# Altium PCB IPG_Rigid.PcbDoc (part 12 of 13)
Units mm, origin at the board's own origin, x right, y up, seen from the top; angles counter-clockwise.
Board outline 69.6 x 90.73 mm, 10 copper layers (TOP, DHOR, DVERT, GND 1, POWER, GND 2, GND 3, AVERT, AHOR, BOT), stack 1.198 mm thick; 745 components, 398 nets, 1997 pads, 2678 vias.
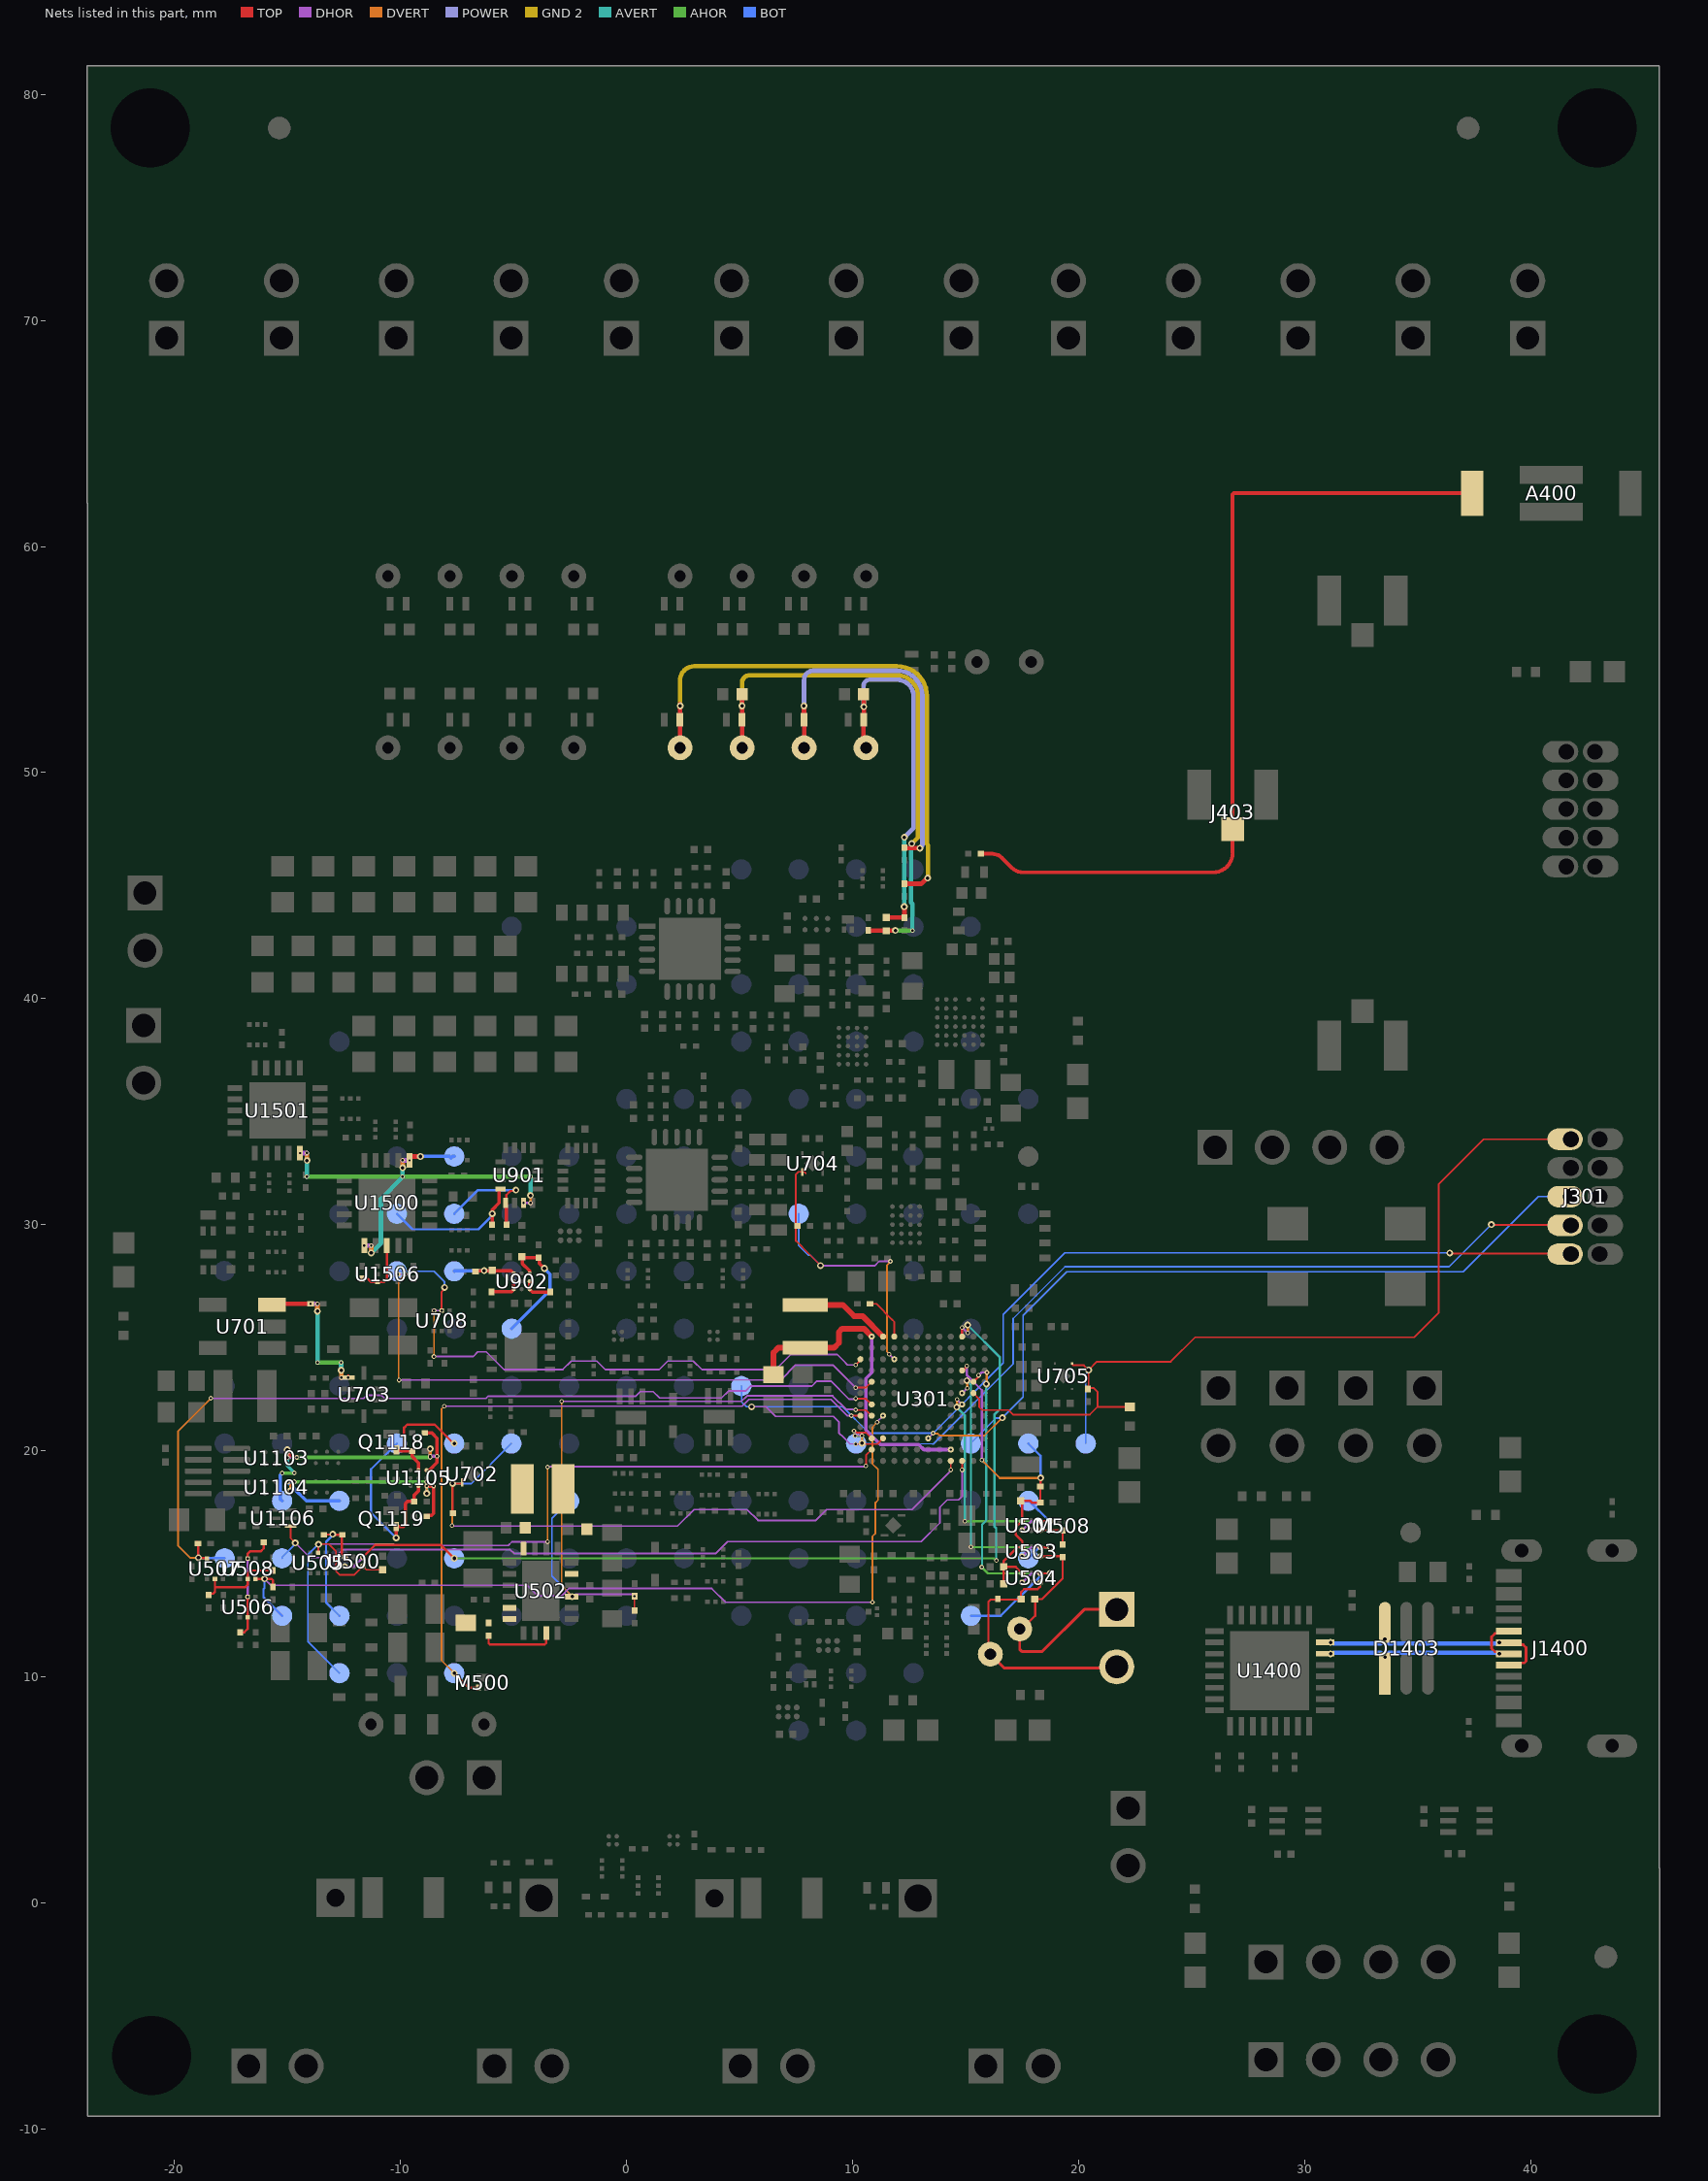
[diagram p16: the nets of this part, all layers, seen from the top]

## Via types
v1: diameter 0.203, hole 0.102, TOP to DHOR, tented top, 561 vias
v2: diameter 0.203, hole 0.102, DHOR to DVERT, tented top, 481 vias
v3: diameter 0.305/0.305/0.305/0.305/0.305/0.305 (per signal layer), hole 0.152, DVERT to AVERT, 397 vias
v4: diameter 0.305/0.305/0/0.305/0.305/0.305 (per signal layer), hole 0.152, DVERT to AVERT, tented top, 283 vias
v5: diameter 0.305/0.305/0.305/0.305/0/0.305/0.305/0.305/0.305/0.305 (per signal layer), hole 0.152, TOP to BOT, 259 vias
v6: diameter 0.305, hole 0.152, TOP to BOT, tented both sides, 169 vias
v7: diameter 0.305/0.305/0.305/0.305/0/0.305/0.305/0.305/0.305/0.305 (per signal layer), hole 0.152, TOP to BOT, tented both sides, 140 vias
v8: diameter 0.203, hole 0.102, AVERT to AHOR, tented top, 101 vias
v9: diameter 0.305/0.305/0.305/0.305/0.305/0.305 (per signal layer), hole 0.152, DVERT to AVERT, tented top, 79 vias
v10: diameter 0.305/0/0/0.305/0/0.305/0.305/0/0/0.305 (per signal layer), hole 0.152, TOP to BOT, tented both sides, 74 vias
v11: diameter 0.305/0.305/0.305/0.305/0.305/0.305/0.305/0.305/0.305/0.305 (per signal layer), hole 0.152, TOP to BOT, tented both sides, 66 vias
v12: diameter 0.203, hole 0.102, AHOR to BOT, tented both sides, 31 vias
v13: diameter 0.203, hole 0.102, DHOR to DVERT, tented both sides, 9 vias
v14: diameter 0.203/0.203 (per signal layer), hole 0.102, DHOR to DVERT, tented top, 7 vias
v15: diameter 0.203/0.203 (per signal layer), hole 0.102, TOP to DHOR, tented top, 7 vias
v16: diameter 0.203, hole 0.102, TOP to DHOR, tented both sides, 5 vias
v17: diameter 0.305, hole 0.152, DVERT to AVERT, tented both sides, 2 vias
v18: diameter 0.305/0.305/0/0.305/0.305/0.305 (per signal layer), hole 0.152, DVERT to AVERT, tented both sides, 2 vias
v19: diameter 0.305, hole 0.152, DVERT to AVERT, tented top, 2 vias
v20: diameter 0.305/0/0/0.305/0.305/0.305/0.305/0/0/0.305 (per signal layer), hole 0.152, TOP to BOT, tented both sides, 1 vias
v21: diameter 0.305/0.305/0/0.305/0.305/0.305 (per signal layer), hole 0.152, DVERT to AVERT, 1 vias
v22: diameter 0.203, hole 0.102, TOP to BOT, tented top, 1 vias

## Nets (pads, with @x,y where several pads share a name; then routed paths per layer and width w, separated by ;. In a path a pad name is that pad's centre, name@x,y a point inside that pad or via, vN(x,y) a via of type N, cw(c..) or ccw(c..) an arc to the next point about the centre after c; other vN are vias at no path point) (continued)
STIMB: TP1501.1 U901.15 U1500.6 U1500.16 U1501.20 | length 20.5
  TOP w0.203: v1(-9.6,32.848) -9.6,32.992 -9.572,33.02 -9.119,33.02 v7(-9.116,33.017)
  DVERT w0.102: v2(-4.25,30.961) v4(-4.25,31.291)
  DVERT w0.203: v4(-14.138,32.84) v2(-14.138,33.171) ; v4(-11.295,28.751) v2(-11.295,29.082) ; v4(-9.905,32.521) v2(-9.905,32.852)
  AVERT w0.203: v8(-14.148,32.131) -14.143,32.136 -14.143,32.835 v4(-14.138,32.84) ; v4(-11.295,28.751) -10.863,29.183 -10.863,31.148 -9.931,32.08 -9.931,32.092 -9.916,32.108 v8@-9.905,32.108 ; v8(-9.906,32.131) v4(-9.905,32.521) ; v4(-4.25,31.291) -4.242,31.3 v8(-4.242,32.131)
  DHOR w0.102: v1(-4.555,30.965) -4.553,30.963 -4.253,30.963 v2@-4.251,30.961
  DHOR w0.203: v1(-14.443,33.167) -14.441,33.169 -14.142,33.169 v2@-14.14,33.171 ; v1(-11.6,29.078) -11.598,29.08 -11.299,29.08 v2(-11.295,29.082) ; v2@-9.904,32.852 -9.902,32.85 -9.602,32.85 v1(-9.6,32.848)
  AHOR w0.203: v8(-14.148,32.131) v8(-4.242,32.131)
  BOT w0.152: v7@-9.119,33.02 -7.832,33.02 -7.762,32.949 -7.691,33.02 TP1501.1@-7.62,33.02
STIMB_SEL: R1505.2 U1500.8 U1506.6 | length 2.7
  TOP w0.102: R1505.2@-11.691,27.604 -11.69,27.605 -11.451,27.605 -11.309,27.463 U1506.6@-11.016,27.463 -10.739,27.463 -10.6,27.601 U1500.8@-10.6,29.078
STIMB_SELn: U301.H11 U1506.2 | length 26.8
  TOP w0.076: v1(10.144,22.792) 10.151,22.799 10.599,22.799 U301.H11@10.85,23.05
  DVERT w0.076: v2(-10.066,23.124) -10.084,23.142 -10.084,27.516 v2(-9.789,27.811)
  DHOR w0.076: v1@-10.116,27.812 v2@-9.79,27.812 ; v2(-10.066,23.124) -10.057,23.132 6.829,23.132 7.486,23.789 9.141,23.789 9.6,23.33 v1@10.138,22.792
  other v1: -10.116,27.813
SW1_VCHG: C507.2 L500.1 U502.20
SW2_VCHG: C506.2 L500.2 U502.15
SWCLK: J301.4 TP301.1 U301.C11 | length 39.1
  TOP w0.076: v1(10.068,20.88) 10.102,20.88 10.181,20.801 10.599,20.801 U301.C11@10.85,20.55 ; v7(38.265,30.006) 38.282,29.989 41.766,29.989 J301.4@41.783,29.972
  DVERT w0.102: v2@10.417,20.669 v8(10.423,20.664) 10.423,20.363 v4@10.428,20.357
  AVERT w0.102: v8(10.423,20.664) 10.426,20.661 10.426,20.36 v4@10.428,20.357
  DHOR w0.076: v1(10.068,20.88) 10.254,20.694 10.394,20.694 v2(10.419,20.669)
  AHOR w0.102: v12(10.114,20.665) v8@10.422,20.664
  BOT w0.076: TP301.1@10.16,20.32 11.076,20.32 13.537,20.3 13.569,20.3 17.109,23.84 17.109,25.848 19.405,28.143 36.398,28.143 v7@38.265,30.01
  other v4: 10.419,20.333
SWDIO: J301.2 TP300.1 U301.C10 | length 49.4
  TOP w0.076: v1(10.141,20.3) 11.1,20.3 U301.C10@11.35,20.55 ; v7(36.424,28.749) 36.447,28.725 41.76,28.725 J301.2@41.783,28.702
  DHOR w0.076: v7(5.537,21.946) 6.177,21.946 6.602,21.52 9.154,21.52 9.399,21.276 9.399,20.795 9.6,20.594 9.894,20.3 v1(10.141,20.3)
  BOT w0.076: TP300.1@5.08,22.86 5.101,22.839 5.101,22.153 5.308,21.946 v7(5.537,21.946) 9.564,21.946 10.731,20.779 13.568,20.779 16.669,23.88 16.669,26.03 19.392,28.753 v7@36.424,28.753
SWO: J301.6 TP305.1 U301.C6 | length 37
  TOP w0.076: v1(13.35,20.55) U301.C6@13.358,20.55
  DVERT w0.076: v2(13.566,20.777) 13.591,20.753 13.777,20.753 13.854,20.676 15.841,20.676 16.6,21.434 v7(16.628,21.462)
  DHOR w0.076: v1(13.35,20.55) 13.351,20.556 v2@13.564,20.77
  BOT w0.076: TP305.1@15.24,20.32 15.24,20.337 16.35,21.447 16.55,21.447 16.6,21.497 v7@16.628,21.525 ; v7(16.628,21.462) 16.628,21.498 v7@16.628,21.525 ; J301.6@41.783,31.242 40.351,31.242 37.023,27.915 20.834,27.915 20.486,27.915 19.482,27.915 17.551,25.984 17.551,22.386 16.691,21.525 v7@16.628,21.525
SYS_RSTn: J301.10 R300.2 R304.2 TP712.1 U301.G2 U705.1 | length 42.6
  TOP w0.076: U301.G2@15.35,22.55 15.601,22.299 15.601,21.941 15.741,21.8 16.9,21.8 17.1,21.6 20.5,21.6 20.84,21.94 20.84,22.61 20.669,22.78 R300.2@20.392,22.78 ; 19.739,23.781 20.238,23.781 v7(20.447,23.571) ; R300.2@20.417,22.78 20.447,22.81 v7(20.447,23.571) ; 20.84,21.943 R304.2@22.265,21.943 ; J301.10@41.783,33.782 37.922,33.782 35.941,31.801 35.941,26.111 34.849,25.019 25.159,25.019 24.081,23.941 20.817,23.941 v7(20.447,23.571)
  BOT w0.076: TP712.1@20.32,20.32 20.32,23.382 20.447,23.509 v7(20.447,23.571)
TEMP_EN: C515.2 C516.2 C517.2 R515.1 R516.2 TP508.1 U301.J3 U501.A2 U503.A2 U504.A2 | length 16.8
  TOP w0.102: U301.J3@14.85,23.55 14.896,23.55 15.031,23.685 15.031,23.69 15.062,23.722 v1(15.062,23.749) ; C517.2@16.683,14.122 C516.2@16.683,14.859 ; C515.2@17.45,17.785 C515.2@17.508,17.727 ; U504.A2@17.51,14.573 17.462,14.573 17.462,14.622 17.225,14.859 C516.2@16.683,14.859 ; R516.2@18.306,17.704 17.942,17.704 17.866,17.78 17.572,17.78 17.531,17.739 17.531,17.704 C515.2@17.508,17.727 ; R516.2@18.313,17.704 R515.1@18.313,18.415 ; R515.1@18.324,18.362 v7(18.324,18.797) ; C516.2@16.683,14.859 16.683,15.113 17.302,15.732 U503.A2@17.517,15.732 17.517,15.993 17.221,16.288 17.221,16.601 U501.A2@17.508,16.888 C515.2@17.508,17.727
  DVERT w0.102: v2(15.721,19.591) 16.516,18.797 v7(18.324,18.797)
  DHOR w0.102: v1(15.062,23.749) 15.062,23.339 15.721,22.68 v2(15.721,19.591)
  BOT w0.102: TP508.1@17.78,20.32 18.324,19.776 v7(18.324,18.797)
THERM.OFST: TP512.1 U301.H2 U504.A1 U504.C2 | length 18.3
  TOP w0.102: U301.H2@15.35,23.05 15.562,23.262 15.562,23.32 v1(15.581,23.339) ; v1(18.31,14.573) v7(18.745,14.573)
  DVERT w0.102: v4(15.921,22.952) 15.934,22.965 15.934,23.452 v2(15.947,23.465)
  AVERT w0.102: v8(15.717,14.855) 15.733,14.871 15.733,16.731 15.921,16.919 15.921,18.8 v4(15.921,22.952)
  DHOR w0.102: v1@15.588,23.339 15.714,23.465 v2(15.947,23.465) ; v1(17.51,14.173) 17.91,14.573 v1(18.31,14.573)
  AHOR w0.102: v8(15.717,14.855) 15.998,14.573 v7(18.745,14.573)
  BOT w0.102: TP512.1@15.24,12.7 16.561,12.7 18.434,14.573 v7(18.745,14.573)
THERM.OUT: TP511.1 U301.G3 U503.A1 U503.C2 | length 14.2
  TOP w0.102: U503.C2@18.32,15.731 v7(18.755,15.731)
  DVERT w0.102: v4@15.067,23.071 15.072,23.065 15.072,22.764 v2@15.078,22.759
  AVERT w0.102: v4(15.067,23.101) 15.241,22.927 15.241,18.8 v8(15.241,15.741)
  DHOR w0.102: v1@14.851,22.556 v1(14.85,22.55) 14.856,22.551 15.07,22.764 v2@15.075,22.764 ; v1@17.517,15.339 17.91,15.732 v1(18.317,15.732)
  AHOR w0.102: v8(15.241,15.741) 15.245,15.736 18.75,15.736 v7(18.755,15.731)
  BOT w0.102: TP511.1@17.78,15.24 18.271,15.731 v7(18.755,15.731)
  other v1: 17.51,15.332
  other v2: 15.077,22.766
THERM.REF: TP509.1 U301.F3 U501.A1 U501.C2 | length 12.3
  TOP w0.102: v1(18.308,16.888) U501.C2@18.325,16.905 ; U501.C2@18.311,16.887 v7(18.745,16.887)
  DVERT w0.102: v4@14.623,21.966 v2(14.623,22.266)
  AVERT w0.102: v4(14.613,21.935) 14.613,21.915 14.977,21.551 14.977,18.8 v8(14.977,16.878)
  DHOR w0.102: v2@14.63,22.264 14.844,22.051 v1@14.849,22.051 ; v1(17.517,16.486) 17.919,16.888 v1(18.308,16.888)
  AHOR w0.102: v8(14.977,16.878) 14.981,16.883 18.741,16.883 v7(18.745,16.887)
  BOT w0.102: TP509.1@17.78,17.78 17.816,17.78 18.709,16.887 v7(18.745,16.887)
  other v1: 14.85,22.05
THERM_IN: C513.2 J506.1 J507.1 R518.2 U503.C1 | length 11.1
  TOP w0.102: J507.1@17.5,12.146 17.528,12.146 18.085,12.703 18.085,13.436 18.39,13.437 19.3,14.347 19.3,15.244 19.212,15.332 U503.C1@18.317,15.332
  TOP w0.127: J507.1@17.399,12.116 17.399,11.214 17.488,11.125 18.402,11.125 20.256,12.979 J506.1@21.692,12.979
THERM_OFST_IN: C513.1 J506.2 J508.1 R520.1 U504.C1 | length 11.1
  TOP w0.076: U504.C1@18.31,14.173 U504.C1@18.321,14.173
  TOP w0.102: J508.1@16.1,11 16.013,11.087 16.013,13.32 16.109,13.416 R520.1@16.434,13.416 ; R520.1@16.434,13.445 16.463,13.416 17.404,13.416 C513.1@17.425,13.437 ; C513.1@17.455,13.437 17.455,13.733 17.595,13.873 18.188,13.873 18.31,13.995 U504.C1@18.31,14.173
  TOP w0.127: J508.1@16.1,11 16.711,10.389 J506.2@21.692,10.389
THERM_REF_IN: M508.3 R518.1 U501.C1 | length 1.7
  TOP w0.076: U501.C1@18.308,16.488 19.253,16.488 19.3,16.535 R518.1@19.3,15.894
UFL: A400.1 J403.1 R403.1 | length 38.4
  TOP w0.17: R403.1@15.678,46.409 16.18,46.409 cw(c16.18,45.798) 16.612,46.23 17.043,45.799 ccw(c17.554,46.309) 17.554,45.587 25.953,45.587 ccw(c25.953,46.457) 26.822,46.457 J403.1@26.822,47.497 26.822,62.308 26.872,62.357 A400.1@37.419,62.357
USB_N: D1403.6 J1400.A7 J1400.B7 U1400.15 | length 10
  TOP w0.11: J1400.B7@39.037,10.513 39.132,10.608 39.622,10.608 39.72,10.608 39.802,10.69 39.802,11.296 39.68,11.418 39.132,11.418 J1400.A7@39.037,11.513
  BOT w0.2: v11(31.153,11.518) 31.173,11.498 31.247,11.498 31.273,11.472 32.317,11.472 32.321,11.469 33.365,11.469 33.553,11.657 v11(33.553,11.659) 33.555,11.659 33.744,11.469 36.052,11.469 36.054,11.467 38.501,11.467 38.527,11.493 38.601,11.493 v11(38.621,11.513)
USB_P: D1403.1 J1400.A6 J1400.B6 U1400.14 | length 9.5
  TOP w0.11: v11(38.621,11.013) 38.526,11.108 38.424,11.108 38.278,11.254 38.278,11.772 38.424,11.918 38.942,11.918 J1400.B6@39.037,12.013
  BOT w0.2: v11(31.153,11.018) 31.173,11.038 31.247,11.038 31.273,11.064 32.148,11.064 32.152,11.061 33.365,11.061 v11(33.556,10.871) v11(33.556,10.871) 33.556,10.873 33.744,11.061 35.883,11.061 35.885,11.059 38.501,11.059 38.527,11.033 38.601,11.033 v11(38.621,11.013)
VBUFF_IN+: C905.1 R912.2 TP910.1 U902.A3 | length 5.6
  TOP w0.152: C905.1@-4.628,28.575 C905.1@-4.603,28.55 ; U902.A3@-4.288,27.847 -4.293,27.852 -4.293,27.966 -4.603,28.276 C905.1@-4.603,28.55 ; v7(-3.632,28.067) -3.854,28.289 -3.854,28.513 R912.2@-3.886,28.545 -4.598,28.545 C905.1@-4.603,28.55
  BOT w0.152: TP910.1@-5.08,25.4 -3.378,27.102 -3.378,27.813 v7(-3.632,28.067)
VBUFF_IN-: C904.1 R910.2 TP907.1 U902.A1 | length 3.1
  TOP w0.152: R910.2@-6.68,27.929 -6.643,27.965 v7(-6.298,27.965) -5.953,27.965 C904.1@-5.944,27.975 -5.934,27.965 -5.106,27.965 U902.A1@-4.988,27.847
  BOT w0.152: TP907.1@-7.62,27.94 -7.607,27.953 -6.311,27.953 v7(-6.298,27.965)
VCC_CHG: C512.1 R519.1 U502.5 U502.6
VCHG_DISABLE: M500.1 TP515.1 U301.E12 | length 32.3
  TOP w0.076: v1(9.951,21.55) U301.E12@10.35,21.55
  TOP w0.102: v7(-7.62,10.16) -6.976,9.516 M500.1@-6.55,9.516
  DVERT w0.076: v2(-8.061,21.973) -8.181,21.853 -8.181,10.721 v7(-7.62,10.16)
  DHOR w0.076: v2(-8.061,21.973) 5.113,21.973 5.415,22.276 9.055,22.276 9.781,21.55 v1(9.951,21.55)
VCHG_PGOOD: R523.1 R524.2 TP514.1 U301.E11 U502.13 | length 31.4
  TOP w0.076: R523.1@0.356,12.931 v1(0.356,13.565) ; v1(10.144,21.808) 10.151,21.801 10.599,21.801 U301.E11@10.85,21.55
  DVERT w0.076: v2@-2.87,22.19 -2.87,14.02 v7(-2.4,13.55)
  DHOR w0.076: v2(-2.871,22.191) -2.864,22.184 5.084,22.184 5.328,22.428 9.118,22.428 9.71,21.836 9.86,21.836 9.861,21.834 10.036,21.834 10.038,21.832 10.12,21.832 v1(10.144,21.808) ; v7(-2.4,13.55) -2.348,13.55 -2.241,13.657 0.247,13.657 0.354,13.55 v1@0.36,13.55
  BOT w0.076: TP514.1@-2.54,17.78 -3.302,17.018 -3.302,14.452 v7(-2.4,13.55)
VDAC1_BUF: Q1118.2 R1150.2 TP1105.1 U1105.B1 | length 5.3
  TOP w0.102: -9.842,19.989 -9.842,21.019 -9.703,21.158 -8.484,21.158 -7.645,20.32 v7(-7.624,20.32)
  TOP w0.152: Q1118.2@-10.177,20.039 -10.177,19.991 -10.175,19.989 -9.842,19.989 R1150.2@-9.527,19.989 ; R1150.2@-9.502,19.989 -9.487,19.974 -9.487,19.748 -9.202,19.464 U1105.B1@-9.202,19.139
VDAC2_BUF: Q1119.2 R1153.2 TP1109.1 U1105.B3 | length 8.2
  TOP w0.152: v7(-10.192,16.143) -10.189,16.147 Q1119.2@-10.189,16.643 ; Q1119.2@-10.189,16.648 -9.878,16.648 -9.789,16.738 -9.789,17.665 -9.699,17.754 R1153.2@-9.399,17.755 ; R1153.2@-9.399,17.755 -9.399,18.033 -9.207,18.225 -9.207,18.434 U1105.B3@-9.202,18.439
  BOT w0.102: v7(-10.192,16.143) -11.303,17.254 -11.303,19.177 TP1109.1@-10.16,20.32
VDACA: R1149.1 TP1104.1 U1103.4 U1105.A1 | length 13.9
  TOP w0.152: U1103.4@-15,19.931 -14.98,19.931 -14.765,19.716 -14.595,19.716 v1(-14.585,19.706) ; R1149.1@-8.922,20.789 -8.611,20.789 -8.38,20.558 v1(-8.38,19.763) -8.38,19.484 -8.719,19.144 -8.847,19.144 U1105.A1@-8.852,19.139
  DVERT w0.152: v2(-15.01,19.708) v4(-15.01,20.039) ; v2(-8.685,19.759) v4(-8.685,20.09)
  AVERT w0.152: v4(-15.01,20.039) -15.006,20.035 v8@-15.006,19.706 ; v8(-15.002,19.702) -15.01,19.702 -15.002,19.694 -15.002,19.338 -14.892,19.229 -14.892,19.226 -14.694,19.028 v8(-14.694,19.018) ; v8(-8.687,19.71) v4@-8.687,20.091
  DHOR w0.152: v2@-14.996,19.711 -14.993,19.707 -14.586,19.707 v1(-14.585,19.706) ; v2(-8.685,19.759) -8.682,19.761 -8.382,19.761 v1(-8.38,19.763)
  AHOR w0.152: v12(-15.239,19.014) -15.237,19.016 -14.696,19.016 v8(-14.694,19.018) ; v8(-15.002,19.702) -14.997,19.706 -8.691,19.706 v8(-8.687,19.71)
  BOT w0.152: TP1104.1@-15.24,17.78 -15.26,17.8 -15.316,17.856 -15.316,18.923 -15.239,19 v12(-15.239,19.014)
VDACB: R1152.1 TP1107.1 U1104.4 U1105.A3 | length 13.1
  TOP w0.152: U1105.A3@-8.852,18.439 -8.536,18.439 v1(-8.534,18.437) -8.534,17.232 -8.623,17.143 -8.79,17.143 R1152.1@-8.839,17.094
  DVERT w0.102: v4(-8.839,18.11) v2(-8.839,18.441)
  DVERT w0.152: v4(-14.877,18.214) -14.838,18.253 -14.838,18.459 -14.696,18.6 v2@-14.696,18.629
  AVERT w0.152: v4(-14.877,18.214) -14.838,18.253 -14.838,18.449 -14.691,18.596 v8(-14.691,18.623) ; v8(-8.847,18.618) -8.843,18.614 -8.843,18.114 v4(-8.839,18.11)
  DHOR w0.102: v2@-8.837,18.441 -8.835,18.439 -8.536,18.439 v1(-8.534,18.437)
  DHOR w0.152: v12(-15,18.625) v12(-15,18.625) -14.698,18.627 v2@-14.696,18.629
  AHOR w0.152: v12@-14.999,18.624 v8(-14.691,18.623) ; v8(-14.691,18.623) -8.852,18.623 v8(-8.847,18.618)
  BOT w0.152: v12(-15,18.625) -14.732,18.357 -14.732,18.348 -14.164,17.78 TP1107.1@-12.7,17.78
  other v1: -15,18.625
  other v2: -14.695,18.629
VDD11: C302.2 L300.1 U301.B4 U301.M11 | length 14.5
  TOP w0.254: C302.2@6.5,23.375 6.5,24.34 6.712,24.551 L300.1@7.912,24.552 ; L300.1@7.912,24.552 9.178,24.551 9.398,24.771 9.398,25.251 9.547,25.4 10.511,25.4 10.842,25.069 10.842,25.062 10.847,25.057 U301.M11@10.85,25.057
  DHOR w0.152: v1(10.85,25.05) 10.85,23.449 10.594,23.194 10.594,20.917 11.236,20.275 12.935,20.275 13.159,20.05 v1(14.35,20.05)
VDDA_EN: R717.2 TP714.1 U301.K9 U704.3 | length 15.4
  TOP w0.076: 7.928,32.271 7.862,32.338 U704.3@7.786,32.338 7.605,32.338 7.493,32.226 7.493,29.286 8.055,28.724 v7(8.585,28.194) ; v1(11.849,24.052) v1(11.849,24.052)
  DVERT w0.076: v2(11.622,24.269) 11.622,24.287 11.532,24.377 11.532,28.218 11.676,28.362 v2(11.676,28.379)
  DHOR w0.076: v7(8.585,28.194) 8.598,28.181 10.971,28.181 11.168,28.379 v2(11.676,28.379) ; v2@11.624,24.267 11.629,24.267 11.842,24.053 v1@11.848,24.053
  BOT w0.076: TP714.1@7.62,30.48 7.62,29.083 8.043,28.66 8.119,28.66 v7(8.585,28.194)
VDDS_EN: R716.2 TP713.1 U301.A4 U702.3 | length 30.9
  TOP w0.076: R716.2@-7.674,17.234 -7.692,17.252 v7(-7.692,18.55) -7.294,18.55 -7.277,18.568 U702.3@-7.277,18.599 ; v1(14.35,19.151) U301.A4@14.35,19.55
  DVERT w0.076: v2(-7.722,16.688) -7.707,16.702 -7.707,18.536 v7(-7.692,18.55)
  DHOR w0.076: v2(-7.722,16.688) -7.698,16.664 2.249,16.664 2.984,17.399 5.339,17.399 5.82,16.918 8.377,16.918 8.858,17.399 12.628,17.399 14.35,19.121 v1(14.35,19.151)
  BOT w0.076: v7(-7.692,18.55) -7.684,18.542 -6.873,18.542 TP713.1@-5.095,20.32
VDDSMPS: R303.1 U301.M9 | length 2.1
  TOP w0.076: R303.1@10.78,26.5 11.058,26.5 11.758,25.8 11.85,25.708 U301.M9@11.85,25.05
VDET: R509.2 R511.1 U506.2 U506.5 U508.5 | length 4.9
  TOP w0.102: R509.2@-17.094,11.964 -17.094,12.047 -17.019,11.972 -16.911,11.972 -16.767,12.117 U506.5@-16.767,12.638 v1(-16.767,13.538) ; v1(-16.764,15.233) -16.764,15.437 -16.643,15.558 -16.172,15.558 -16.051,15.678 R511.1@-16.051,15.951
  DHOR w0.102: v1(-16.767,13.538) -16.765,13.539 v1(-16.764,15.233) v1(-16.764,15.233)
VDIF_IN+: R907.1 U902.B3 U902.C3 | length 1.3
  TOP w0.152: U902.B3@-4.288,27.497 U902.C3@-4.288,27.147 -4.16,27.019 R907.1@-3.413,27.019
VDIF_IN-: R900.1 U902.B1 U902.C1 | length 1.3
  TOP w0.152: R900.1@-5.863,27.03 -5.105,27.03 U902.C1@-4.988,27.147 U902.B1@-4.988,27.497
VIMC_IN+: R911.2 TP909.1 U901.13 | length 5
  TOP w0.102: U901.13@-5.353,30.963 -5.319,30.997 -5.319,31.31 -5.137,31.492 -4.93,31.492 v7(-4.891,31.531)
  TOP w0.152: U901.13@-5.325,30.934 -5.325,30.014 R911.2@-5.309,29.998
  BOT w0.102: TP909.1@-7.62,30.48 -6.569,31.531 v7(-4.891,31.531)
VIMC_IN-: R909.2 TP908.1 U901.12 | length 6.6
  TOP w0.152: R909.2@-5.944,29.998 -5.944,30.658 -5.639,30.963 -5.639,31.545 -5.602,31.581 U901.12@-5.572,31.581
  BOT w0.102: TP908.1@-10.16,30.48 -9.474,29.794 -6.552,29.794 -5.944,30.403 -5.944,30.485 v7(-5.941,30.488)
VLXSMPS: L300.2 U301.M10 | length 4
  TOP w0.254: L300.2@7.912,26.452 9.573,26.452 10.066,25.959 10.441,25.959 U301.M10@11.35,25.05
VNSb_EN: TP1115.1 U301.A3 U1106.1 | length 34.8
  TOP w0.076: U1106.1@-14.859,16.668 -14.859,16.127 v7(-14.658,15.926) ; v1(14.85,19.151) U301.A3@14.85,19.55
  DHOR w0.076: v7(-14.658,15.926) -14.003,15.271 -12.899,15.271 -12.549,15.622 -5.14,15.622 -4.978,15.459 3.953,15.459 4.47,15.977 13.039,15.977 13.868,16.806 13.868,17.508 14.189,17.828 14.694,17.828 14.85,17.984 v1(14.85,19.151)
  BOT w0.076: TP1115.1@-15.24,15.24 -15.24,15.292 -14.658,15.874 v7(-14.658,15.926)
VOVP: R510.2 R512.1 U507.2 U508.2 | length 4.1
  TOP w0.102: R510.2@-18.491,13.615 -18.431,13.675 -18.297,13.675 -18.212,13.76 -18.212,13.97 ; U507.2@-18.212,14.333 -18.212,13.97 ; R512.1@-15.646,14.706 -16.622,14.706 -16.764,14.564 U508.2@-16.764,14.333 -16.764,14.067 -16.861,13.97 -18.212,13.97
VPP_FB: R706.1 U701.3 U703.6 | length 6.7
  TOP w0.203: U701.3@-15.69,26.45 -15.64,26.5 v1(-13.98,26.5) ; v1(-12.316,23.234) U703.6@-12.316,23.266
  DVERT w0.203: v4(-13.675,26.173) v2(-13.675,26.504) ; v2(-12.621,23.23) v4(-12.621,23.561)
  AVERT w0.203: v4(-13.675,26.173) -13.67,26.168 -13.67,23.906 v8(-13.665,23.901) ; v8(-12.625,23.901) -12.623,23.899 -12.623,23.563 v4(-12.621,23.561)
  DHOR w0.203: v1@-13.978,26.502 -13.678,26.502 v2(-13.675,26.504) ; v2@-12.619,23.23 -12.617,23.232 v1(-12.316,23.234) v1(-12.316,23.234)
  AHOR w0.203: v8(-13.665,23.901) v8(-12.625,23.901)
VPPSW_EN: TP707.1 U301.K12 U708.2 | length 26.5
  TOP w0.076: v1(-8.179,26.206) -8.179,27.04 -8.052,27.167 v7(-8.052,27.229) ; v1(10.142,23.799) 10.35,24.007 U301.K12@10.35,24.05
  DVERT w0.076: v2(-8.522,24.168) -8.515,24.175 -8.515,26.195 v2(-8.509,26.201)
  DHOR w0.076: v2(-8.522,24.168) -6.789,24.168 -6.58,24.377 -6.208,24.377 -5.422,23.59 -2.819,23.59 -2.444,23.965 -1.311,23.965 -0.936,23.59 1.448,23.59 1.823,23.965 2.957,23.965 3.331,23.59 6.603,23.59 7.27,24.257 9.321,24.257 9.6,23.978 9.78,23.799 9.951,23.799 v1(10.142,23.799) ; v2(-8.509,26.201) -8.506,26.203 -8.181,26.203 v1(-8.179,26.206)
  BOT w0.076: TP707.1@-10.16,27.94 -8.519,27.94 -8.052,27.473 v7(-8.052,27.229)
VRECT.DETn: R513.2 TP505.1 U301.E10 U508.3 | length 39.3
  TOP w0.102: U508.3@-16.414,14.333 U508.3@-16.414,14.333 v7@-16.019,14.334 ; R513.2@-15.646,13.971 -15.646,14.273 -15.708,14.335 v7(-16.018,14.335) ; v7@-16.019,14.334 v7(-16.018,14.335)
  DVERT w0.076: v2(10.884,13.297) 10.884,16.212 11.013,16.342 11.013,17.705 11.125,17.817 11.125,18.8 11.125,19.181 10.884,19.421 10.884,21.05 v2(11.093,21.259)
  DHOR w0.076: v7(-16.018,14.335) -15.732,14.048 -4.391,14.048 -3.927,13.584 -2.874,13.584 -2.549,13.909 3.77,13.909 4.382,13.297 v2(10.884,13.297) ; v2(11.093,21.259) 11.093,21.276 11.349,21.532 v1@11.349,21.549
  BOT w0.102: v7(-16.018,14.335) -16.018,13.921 -16.06,13.879 -16.06,13.52 TP505.1@-15.24,12.7
  other v1: 11.35,21.55
VRECT.MON: TP504.1 U301.M3 U500.A1 U500.C2 | length 41.8
  TOP w0.102: v1(-11.665,15.284) U500.A1@-11.665,15.291 -11.132,15.824 -8.204,15.824 v7(-7.62,15.24) ; U301.M3@14.85,25.05 v1@14.85,25.452
  DVERT w0.102: v2(15.099,25.216) v4@15.099,25.584
  AVERT w0.102: v4(15.094,25.559) 15.099,25.559 15.099,25.554 16.524,24.13 16.524,21.845 16.276,21.597 16.276,18.8 16.276,16.656 16.359,16.573 16.359,15.886 16.357,15.884 16.357,15.159 v8(16.366,15.15)
  DHOR w0.102: v1(-12.465,14.891) -12.058,14.891 v1(-11.665,15.284) v1@-11.665,15.291 ; v1@14.85,25.446 v1(14.85,25.449) 14.857,25.449 15.09,25.216 v2(15.099,25.216)
  AHOR w0.102: v7(-7.62,15.24) 16.248,15.24 16.338,15.15 v8(16.366,15.15)
VRECT.MON_EN: C514.2 TP503.1 U301.B11 U500.A2 U505.2 | length 39.5
  TOP w0.076: U505.2@-13.64,15.487 -13.634,15.493 -13.634,15.853 v7(-13.627,15.859) ; v7@-13.633,15.863 -13.619,15.877 -13.175,15.877 -12.857,15.559 -12.857,14.664 -12.705,14.513 -12.043,14.513 U500.A2@-11.665,14.891 -11.511,14.737 C514.2@-10.795,14.737 ; v1@10.599,19.351 10.599,19.799 U301.B11@10.85,20.05
  DVERT w0.076: v2(-3.489,15.975) v2(-3.489,19.279)
  DHOR w0.076: v7(-13.627,15.859) -13.61,15.877 -10.303,15.877 -10.231,15.805 -5.235,15.805 -5.069,15.971 -3.492,15.971 v2(-3.489,15.975) ; v2(-3.489,19.279) -3.475,19.292 10.507,19.292 10.559,19.344 v1@10.592,19.344
  BOT w0.076: v7(-13.627,15.859) -13.645,15.859 -14.1,15.404 -14.1,11.56 TP503.1@-12.7,10.16
  other v1: 10.596,19.326
VRECT.OVPn: R514.2 TP506.1 U301.F11 U507.6 | length 40.9
  TOP w0.076: v1(10.144,22.308) 10.151,22.301 10.599,22.301 U301.F11@10.85,22.05
  TOP w0.102: R514.2@-18.989,15.967 -18.945,15.922 -18.945,15.272 v7(-18.938,15.265) ; v7@-18.938,15.249 -18.578,15.249 U507.6@-18.562,15.233
  DVERT w0.076: v7(-18.938,15.265) -19.317,15.265 -19.837,15.785 -19.837,20.872 v2(-18.386,22.323)
  DHOR w0.076: v2(-18.386,22.323) -18.376,22.312 -11.623,22.312 -11.494,22.441 -11.484,22.45 -10.826,22.45 -10.692,22.316 -6.219,22.316 -6.12,22.415 0.41,22.415 0.614,22.62 1.18,22.62 1.463,22.337 4.206,22.337 4.515,22.645 5.276,22.645 5.491,22.86 8.208,22.86 8.428,23.08 9.043,23.08 9.84,22.284 10.12,22.284 v1(10.144,22.308)
  BOT w0.102: v7(-18.938,15.265) -18.926,15.253 -17.793,15.253 TP506.1@-17.78,15.24
VRECT_MON_IN: R506.2 R508.2 TP513.1 U500.C1 | length 5.7
  TOP w0.1: R506.2@-13.351,16.256 -13.314,16.293 -13.01,16.293 v7(-12.998,16.306) ; v7@-12.998,16.282 -12.997,16.284 R508.2@-12.571,16.284 ; R508.2@-12.599,16.18 -12.599,15.429 -12.465,15.295 U500.C1@-12.465,15.291
  BOT w0.1: v7(-12.998,16.306) -12.998,16.266 -13.29,15.974 -13.29,13.29 TP513.1@-12.7,12.7
VS2_CHG: R519.2 U502.9 | length 3.3
  TOP w0.1: R519.2@-6.1,11.775 -6.1,11.489 -6.041,11.43 -3.624,11.43 -3.55,11.504 U502.9@-3.55,11.925
XL_ACC: C1210.2 C1301.2 D1212.2 J1213.1 R1304.2 | length 24.5
  TOP w0.2: J1213.1@5.114,51.097 v6(5.114,52.953) C1210.2@5.114,53.535 ; R1304.2@10.7,43.02 10.713,43.007 11.493,43.007 C1301.2@11.5,43 11.507,43.007 11.885,43.007 v7(11.894,43.016)
  GND 2 w0.2: v6(5.114,52.953) 5.114,53.973 cw(c5.448,53.973) 5.448,54.306 11.971,54.306 cw(c11.971,53.377) 12.9,53.377 ; v4(12.62,46.863) 12.9,47.143 12.9,53.373
  AVERT w0.2: v4(12.62,46.863) 12.6,46.843 12.6,46.769 12.595,46.763 12.595,44.252 12.651,44.196 v8(12.651,43.014)
  AHOR w0.2: v7(11.894,43.016) 11.941,43.016 11.942,43.017 12.647,43.017 v8@12.65,43.014
  BOT w0.2: J1213.1@5.073,51.139 5.114,51.139 J1213.1@5.114,51.097
XL_GND: C1214.2 C1301.1 D1216.2 J1217.1 R1305.2 | length 17.1
  TOP w0.2: J1217.1@10.357,51.34 ccw(c10.6,51.34) J1217.1@10.39,51.218 ; C1214.2@10.497,53.467 10.502,53.467 D1216.2@10.502,52.345 10.49,52.345 10.49,51.208 ccw(c10.6,51.208) J1217.1@10.6,51.097
  TOP w0.203: C1301.1@11.5,43.6 11.5,43.615 11.525,43.59 R1305.2@12.29,43.59 ; v5(12.29,44.067) 12.295,44.062 12.295,43.588 R1305.2@12.294,43.586
  POWER w0.2: v6(10.497,52.917) 10.497,53.467 10.491,53.467 10.491,53.842 cw(c10.758,53.842) 10.758,54.109 11.969,54.109 cw(c11.969,53.377) 12.7,53.377 12.7,47.549 v9(12.294,47.142)
  AVERT w0.2: v5(12.29,44.067) 12.292,44.069 12.292,47.14 v9(12.294,47.142)
  AHOR w0.2: v5(12.29,44.067) v5@12.292,44.064
XL_SCL: D1204.2 J1205.1 R1302.2 | length 24.4
  TOP w0.2: J1205.1@2.371,51.097 2.367,51.102 2.367,52.341 D1204.2@2.363,52.345 2.369,52.351 2.369,53.027 v6@2.375,53.033 ; R1302.2@12.3,45.08 13.04,45.08 13.299,45.339 v7(13.327,45.339)
  GND 2 w0.2: v6@2.375,53.033 2.375,54.147 cw(c2.992,54.086) 2.992,54.706 11.971,54.706 cw(c11.971,53.382) 13.295,53.382 13.295,53.373 13.295,51.348 13.295,47.957 13.295,46.847 13.346,46.796 13.346,45.357 v7(13.327,45.339)
  BOT w0.2: J1205.1@2.243,51.097 J1205.1@2.371,51.097
  other v6: 2.375,52.953
XL_SDA: D1208.2 J1209.1 R1303.2 | length 17.1
  TOP w0.2: J1209.1@7.563,51.391 ccw(c7.857,51.391) 7.585,51.28 ccw(c7.857,51.391) 7.857,51.097 7.86,51.099 7.86,52.343 D1208.2@7.862,52.345 7.855,52.351 7.855,52.952 v6@7.849,52.959 ; R1303.2@12.323,46.693 12.323,46.669 12.325,46.667 12.968,46.667 v11(12.982,46.653)
  POWER w0.2: v6@7.849,52.959 7.857,52.968 7.857,54.108 cw(c8.256,54.108) 8.256,54.506 11.971,54.506 cw(c11.971,53.381) 13.096,53.384 13.096,46.796 12.982,46.682 v11(12.982,46.653)
  BOT w0.2: J1209.1@7.805,51.097 J1209.1@7.857,51.097
  other v6: 7.849,52.953
pads on no net: A400.2 A400.3 A400.4 D1403.3 D1403.4 J301.7 J301.8 J400.6 J400.7 J400.8 J1400.A8 J1400.B8 U300.7 U301.A11 U301.C4 U301.D5 U301.F2 U301.F4 U301.H3 U301.H10 U301.H12 U301.K5 U301.L5 U301.M2 U301.M5 U400.A5 U400.F4 U400.F5 U400.G5 U500.B2 U501.B2 U502.17 U503.B2 U504.B2 U604.B2 U605.B2 U607.3 U607.4 U607.5 U703.5 U800.1 U900.1 U900.2 U900.3 U900.15 U900.16 U901.1 U901.2 U901.3 U901.7 U903.B2 U1000.11 U1002.11 U1102.10 U1103.3 U1104.3 U1106.5 U1400.3 U1400.7 U1400.8 U1400.9 U1400.10 U1400.11 U1400.12 U1400.13 U1400.18 U1400.21 U1400.22 U1400.27 U1400.28 U1400.29 U1400.31 U1400.32 U1401.4 U1401.5 U1402.4 U1402.5 U1501.14 U1501.15 U1501.16 U1501.17 X100.Fid X101.Fid X102.Fid X103.Fid X104.Fid X105.Fid X106.1 X107.1 X108.1 Y300.2 Y400.2

## Polygon pours and split planes (outlines as drawn)
GND on TOP "NONET_L-01_P-001" (solid, pour order 420): -23.876,-9.449 45.72,-9.474 45.745,-9.449 45.745,81.28 45.72,81.305 -23.876,81.305 -23.902,81.28 -23.902,59.588 -23.851,59.588 -23.851,49.632 -23.851,3.683 -23.876,3.683
ENCL on TOP "ENCL_L01_P187" (solid, remove dead copper, pour order 187): -17.118,59.743 14.122,59.743 14.122,49.352 -18.263,49.352 -20.193,51.283 -20.193,56.667
no net on TOP "NONET_L01_P-001" (solid, pour order 421): 36.919,63.357 37.919,63.357 37.919,61.357 36.919,61.357
GND on TOP "NONET_L-01_P-001" (solid, remove dead copper, pour order 405): 39.187,3.659 39.187,6.045 45.401,6.045 45.401,3.659
+V_UNREG on TOP "NONET_L-01_P-001" (solid, pour order 228): 6.325,15.526 5.299,15.526 5.299,13.047 2.328,13.047 2.328,16.016 1.719,16.016 1.719,14.732 0.864,14.732 0.864,12.112 0.864,11.227 6.325,11.227
+VBUS on TOP "NONET_L-01_P-001" (solid, remove dead copper, pour order 370): 33.969,12.325 35.001,12.325 35.001,13.36 36.22,13.36 36.22,12.573 36.246,12.548 36.982,12.548 37.008,12.573 37.008,13.259 37.683,13.259 37.693,13.261 39.726,13.261 39.726,13.945 37.683,13.945 36.906,13.945 35.306,13.945 35.306,15.494 38.024,15.494 38.049,15.519 38.049,18.39 29.723,18.39 29.723,13.564 33.956,13.564
+VMAGNET on TOP "NONET_L-01_P-001" (solid, remove dead copper, pour order 343): 11.503,13.31 12.734,13.31 13.027,13.31 13.027,14.021 13.159,14.153 13.646,14.153 13.646,15.723 12.15,15.723 12.15,14.212 11.503,13.566
+HVIN on TOP "NONET_L-01_P-001" (solid, pour order 360): 4.599,15.331 4.599,16.383 3.553,16.383 3.553,15.331
+VDDA on TOP "NONET_L-01_P-001" (solid, pour order 349): 9.221,32.777 9.221,34.956 8.23,34.956 8.23,33.177 8.63,32.777
+V_UNREG on TOP "NONET_L-01_P-001" (solid, pour order 347): 8.63,32.577 9.221,32.577 9.221,30.337 8.23,30.337 8.23,32.177
+VIMP_PP on TOP "NONET_L-01_P-001" (solid, pour order 346): -7.508,33.411 -8.498,33.411 -8.498,34.747 -7.508,34.747
+VCHG_RAIL on TOP "TOP-VCHG_RAIL" (solid, remove dead copper, pour order 345): -0.072,16.806 -1.016,16.806 -1.016,18.313 -0.356,18.313 -0.356,17.932 -0.26,17.842 -0.26,17.171 0.4,17.171 0.4,16.674 2.961,16.674 2.955,18.228 3.705,18.228 3.705,17.054 5.129,17.054 5.129,16.434 3.397,16.434 3.397,16.1 0.889,16.1 0.889,15.062 0.889,14.757 -0.072,14.757
+VBAT1F on TOP "NONET_L-01_P-001" (solid, pour order 329): -5.72,-0.829 -5.701,2.062 -2.148,2.062 -2.148,1.785 -0.985,1.774 -0.974,2.707 -6.96,2.707 -6.96,-0.829
NetR701_2 on TOP "NONET_L-01_P-001" (solid, pour order 327): 3.519,15.46 3.519,15.977 2.486,15.977 2.486,15.46 2.906,15.46
+V_UNREG on TOP "TOP-V_UNREG" (solid, pour order 325): 11.7,15.1 11.7,16.3 11.4,16.6 5.299,16.6 5.299,15.1
+DVDD on TOP "+DVDD_L01_P304" (solid, pour order 304): 11.895,16.312 12.421,16.838 12.421,17.362 10.082,17.362 10.082,18.364 10.692,18.364 10.692,17.87 11.706,17.87 11.706,18.364 12.243,18.364 12.243,17.87 13.208,17.87 13.208,18.39 13.759,18.39 13.756,17.87 13.335,17.45 13.335,16.814 13.862,16.814 13.862,16.44 14.503,16.44 14.581,16.44 14.581,15.322 13.741,15.767 13.281,15.767 11.895,15.767
+VDDS on TOP "TOP-VDDS" (solid, pour order 298): -20.759,19.9 -20.1,19.9 -20.1,17.9 -18.3,17.9 -18.3,18.3 -19.7,18.3 -19.7,19.9 -18.3,19.9 -18.3,20.315 -20.041,20.315 -20.759,20.315
+HVOUT on TOP "TOP-NetC505_1" (solid, remove dead copper, pour order 272): -13.6,23.8 -8.941,23.8 -8.941,24.308 -8.429,24.308 -8.429,25.472 -9.123,25.472 -9.123,25.1 -13,25.1 -13,26.8 -13.6,26.8 -13.6,25.1
+VDDS on TOP "NONET_L-01_P-001" (solid, pour order 266): -5.842,19.074 -5.842,21.254 -6.833,21.254 -6.833,19.474 -6.433,19.074
+V_UNREG on TOP "NONET_L-01_P-001" (solid, pour order 254): -6.433,18.874 -5.842,18.874 -5.842,16.635 -6.833,16.635 -6.833,18.474
CHG1_VCC on TOP "NONET_L-01_P-001" (solid, pour order 242): -0.14,21 -0.14,18.8 -1.016,18.8 -1.016,21
CHG2_VCC on TOP "NONET_L-01_P-001" (solid, pour order 236): 3.8,21 3.8,20.117 3.607,19.939 3.607,19.406 3.5,19.253 3.5,18.745 2.845,18.745 2.845,21
VCC_CHG on TOP "NONET_L-01_P-001" (solid, pour order 219): -4.8,13.2 -7.95,13.2 -7.95,12.1 -4.8,12.1
+VBAT2F on TOP "NONET_L-01_P-001" (solid, pour order 206): 9.912,-0.862 9.912,1.309 5.817,1.309 5.811,3.179 11.068,3.179 11.068,-0.862
NetC1404_1 on TOP "NONET_L-01_P-001" (solid, remove dead copper, pour order 373): 34.694,-3.251 34.694,3.15 35.662,3.15 35.662,3.353 36.653,3.353 36.653,2.707 36.653,1.295 37.186,1.295 37.186,-3.251
NetC1406_2 on TOP "NONET_L-01_P-001" (solid, remove dead copper, pour order 372): 26.543,-3.251 26.543,3.15 28.118,3.15 28.118,3.353 29.108,3.353 29.108,2.707 29.108,-0.889 29.642,-0.889 29.642,-3.251
+VBUS on TOP "NONET_L-01_P-001" (solid, remove dead copper, pour order 371): 26.518,3.988 26.518,5.639 32.588,5.639 32.588,8.636 36.551,8.636 36.551,5.639 38.659,5.639 38.659,3.988
SW1_VCHG on TOP "NONET_L-01_P-001" (solid, pour order 339): -4.75,17.043 -4.742,15.257 -4.318,15.265 -4.318,16.104 -3.962,16.103 -3.962,17.043 -3.962,19.558 -5.258,19.558 -5.258,17.043
SW2_VCHG on TOP "NONET_L-01_P-001" (solid, pour order 338): -1.981,14.718 -2.722,14.718 -2.727,14.425 -1.448,14.425 -1.448,19.558 -3.454,19.558 -3.456,17.163 -2.083,17.163 -2.083,16.154 -1.981,16.154
BST2_VCHG on TOP "NONET_L-01_P-001" (solid, pour order 337): -2.788,14.935 -2.1,14.925 -2.125,15.175 -2.235,15.347 -2.235,16.967 -2.957,16.967 -2.957,16.154 -2.788,15.99
BST1_VCHG on TOP "NONET_L-01_P-001" (solid, pour order 336): -4.875,14.925 -4.875,16.967 -5.683,16.967 -5.683,15.94 -5.436,14.925
NetD700_2 on TOP "NONET_L-01_P-001" (solid, pour order 196): -16.9,21.178 -16.9,25.044 -14,25.044 -14,23.978 -15.2,23.978 -15.2,21.178
+V_UNREG on TOP "NONET_L-01_P-001" (solid, pour order 220): -1.295,3.48 2.041,3.48 2.041,2.769 -1.295,2.769
+HVIN on TOP "NONET_L-01_P-001" (solid, pour order 188): -17.1,25.044 -19.4,25.044 -19.4,21.178 -17.1,21.178
GND on AHOR "NONET_L-01_P-001" (solid, remove dead copper, pour order 381): 25.044,8.077 25.044,14.362 42.57,14.362 42.57,8.077
+DVDD on POWER "POWER-+DVDD" (solid, pour order 402): -21.565,5.156 -4.267,5.156 -4.267,11.19 4.166,11.19 4.166,5.004 45.697,5.004 45.697,46.111 41.433,46.111 45.697,46.155 45.697,73.304 20.168,73.304 20.168,46.111 14.08,46.111 14.08,47.626 6.375,47.626 6.375,42.545 12.465,42.545 12.465,32.004 13.802,32.004 13.802,27.813 7.851,27.813 7.851,14.326 -3.277,14.326 -3.277,16.476 -21.565,16.476
GND on POWER "POWER-GND" (solid, pour order 404): 14.1,46.101 17.043,46.101 17.043,47.626 18.999,47.626 18.999,53.721 20.066,53.721 20.066,56.54 14.199,56.54 14.199,53.721 14.275,53.721 14.275,47.955 14.1,47.955
+VIMP_PP on POWER "NONET_L-01_P-001" (solid, remove dead copper, pour order 355): -8.741,33.848 -8.741,47.626 -0.445,47.626 -0.445,29.466 -7.002,29.466 -7.002,29.312 -6.895,29.312 -6.895,33.848
+V_UNREG on POWER "NONET_L-01_P-001" (solid, remove dead copper, pour order 348): -3.192,14.411 -3.192,16.587 -7.137,16.587 -7.137,17.882 -1.219,17.882 -1.219,15.581 4.256,15.581 5.241,16.681 5.258,28.854 6.071,28.854 6.071,31.699 9.246,31.699 9.246,30.48 7.769,30.48 7.769,14.411
+VDDA on POWER "NONET_L-01_P-001" (solid, remove dead copper, pour order 356): 5.258,25.341 5.258,28.854 6.071,28.854 6.071,31.699 9.246,31.699 9.246,30.48 7.772,30.48 7.772,27.813 13.802,27.813 13.802,32.004 12.465,32.004 12.465,42.545 6.375,42.545 6.375,47.625 -0.445,47.625 -0.445,25.341
+VPP on POWER "NONET_L-01_P-001" (solid, remove dead copper, pour order 353): -17.145,47.625 -17.145,46.609 -14.605,46.609 -14.605,47.625 -8.839,47.625 -8.839,33.757 -7.002,33.757 -7.002,25.124 -21.832,25.124 -21.882,25.175 -21.882,47.625
+VDDS on POWER "NONET_L-01_P-001" (solid, remove dead copper, pour order 352): -21.648,16.561 -21.648,21.263 -21.63,21.27 -5.726,21.27 -5.69,21.234 -5.69,18.085 -5.726,18.048 -7.291,18.048 -7.291,16.561 -7.352,16.561
+HVIN on POWER "NONET_L-01_P-001" (solid, remove dead copper, pour order 350): -5.588,18.059 -1.041,18.059 -1.041,15.672 4.612,15.672 4.612,16.114 3.52,17.206 0.675,17.206 0.675,20.015 -3.886,20.015 -3.886,23.159 -7.211,23.159 -7.211,25.044 -22.327,25.044 -22.327,21.366 -5.588,21.366
+VIMP_3V3 on POWER "NONET_L-01_P-001" (solid, remove dead copper, pour order 354): -7.14,23.211 -7.14,25.038 -6.894,25.038 -6.894,29.373 -0.445,29.373 -0.445,25.324 -3.682,25.324 -3.861,25.146 -3.861,23.211
+VCHG_RAIL on POWER "NONET_L-01_P-001" (solid, remove dead copper, pour order 351): 0.76,17.3 0.76,20.095 -3.785,20.095 -3.785,25.258 5.174,25.258 5.205,25.228 5.205,16.228 5.12,16.143 4.612,16.143 4.594,16.151 3.618,17.127 3.616,17.128 3.487,17.258
GND on POWER "|" (solid, pour order 397): -17.145,46.609 -17.145,47.625 -14.605,47.625 -14.605,46.609 -15.469,46.609
no net on Layer0 "Default Coverlay 2 Bottom" (split plane): 6.747,59.977 8.75,59.977 8.75,61.925 6.747,61.925
no net on Layer0 "Default Coverlay 2 Bottom" (split plane): 2.747,59.977 4.747,59.977 4.747,61.925 2.747,61.925
no net on Layer0 "Default Coverlay 2 Bottom" (split plane): -0.75,59.977 0.753,59.977 0.753,61.925 -0.75,61.925
no net on Layer0 "Default Coverlay 2 Bottom" (split plane): -4.75,59.977 -2.747,59.977 -2.747,61.92 -4.75,61.925
no net on Layer0 "Default Coverlay 2 Bottom" (split plane): -6.747,59.977 -6.747,61.925 -8.75,61.925 -8.75,59.977
no net on Layer0 "Default Coverlay 2 Bottom" (split plane): 17.44,46.855 17.578,46.071 23.822,46.071 23.822,61.925 10.747,61.925 10.747,59.977 10.795,59.977 10.87,59.974 11.016,59.944 11.154,59.887 11.278,59.804 11.384,59.698 11.467,59.574 11.524,59.436 11.553,59.29 11.557,59.215 11.557,57.183 11.557,57.108 11.586,56.96 11.644,56.822 11.727,56.697 11.833,56.591 11.958,56.508 12.097,56.45 12.244,56.421 12.319,56.421 18.923,56.421 19.053,56.41 19.298,56.322 19.499,56.157 19.633,55.934 19.67,55.809 19.67,53.986 19.634,53.86 19.5,53.637 19.299,53.472 19.053,53.384 18.923,53.373 18.923,51.021 18.919,50.946 18.89,50.8 18.833,50.661 18.75,50.537 18.645,50.432 18.52,50.349 18.382,50.291 18.236,50.262 18.161,50.259 16.637,50.259 16.562,50.259 16.415,50.229 16.276,50.172 16.151,50.088 16.045,49.982 15.962,49.857 15.904,49.718 15.875,49.571 15.875,49.496 15.875,47.957 16.126,47.957 16.243,47.952 16.472,47.912 16.69,47.832 16.891,47.716 17.069,47.567 17.219,47.388 17.335,47.187 17.415,46.969 17.44,46.855
no net on Layer0 "Default Coverlay 2 Bottom" (split plane): 20.861,27.442 21.21,25.458 23.822,25.458 23.822,27.442
no net on Layer0 "Default Coverlay 2 Bottom" (split plane): 20.168,31.379 20.515,29.408 23.822,29.408 23.822,31.379
no net on Layer0 "Default Coverlay 2 Bottom" (split plane): 19.314,36.225 19.821,33.35 23.822,33.35 23.822,36.225
no net on Layer0 "Default Coverlay 2 Bottom" (split plane): 18.619,40.17 18.933,38.385 18.934,38.382 18.966,38.202 23.822,38.202 23.822,40.17
no net on Layer0 "Default Coverlay 2 Bottom" (split plane): 17.925,44.104 18.272,42.139 23.822,42.139 23.822,44.104
no net on Layer0 "Default Coverlay 2 Bottom" (split plane): 23.848,-3.852 23.848,-0.316 23.822,-0.316 23.822,23.484 21.551,23.484 21.585,23.217 21.641,22.681 21.679,22.144 21.697,21.605 21.7,21.336 21.688,20.725 21.592,19.507 21.401,18.301 21.115,17.113 20.738,15.951 20.27,14.823 19.716,13.734 19.078,12.693 18.36,11.704 17.566,10.775 16.702,9.911 15.773,9.118 14.785,8.4 13.744,7.762 12.655,7.207 11.527,6.74 10.365,6.362 9.177,6.077 7.97,5.886 6.752,5.79 6.142,5.778 5.842,5.778 5.761,5.782 5.602,5.814 5.453,5.876 5.318,5.966 5.204,6.08 5.114,6.215 5.052,6.364 5.02,6.523 5.016,6.604 5.016,10.16 5.016,10.229 4.989,10.364 4.937,10.491 4.86,10.605 4.763,10.702 4.649,10.779 4.522,10.831 4.387,10.858 4.318,10.858 2.604,10.858 2.604,3.759 13.182,3.759 13.332,3.752 13.625,3.694 13.901,3.579 14.149,3.413 14.36,3.202 14.526,2.954 14.641,2.678 14.699,2.385 14.706,2.235 14.706,-0.305 14.699,-0.454 14.641,-0.747 14.526,-1.023 14.36,-1.272 14.149,-1.483 13.901,-1.649 13.625,-1.763 13.332,-1.821 13.182,-1.829 7.497,-1.829 7.497,-3.852
no net on Layer0 "Default Coverlay 2 Bottom" (split plane): -1.5,-3.852 1.5,-3.852 1.5,-1.829 -1.5,-1.829
no net on Layer0 "Default Coverlay 2 Bottom" (split plane): 3.497,-3.852 5.5,-3.852 5.5,-1.829 3.497,-1.829
no net on Layer0 "Default Coverlay 2 Bottom" (split plane): 45.72,-9.449 23.853,-9.449 -23.851,-9.449
GND on DVERT "|" (solid, pour order 396): 15.505,56.769 20.142,56.769 20.142,53.442 15.505,53.442
ENCL on DVERT "ENCL_L03_P367" (solid, pour order 367): -16.593,59.497 15.505,59.497 15.505,49.767 -18.045,49.767 -19.22,50.941 -19.22,56.869
no net on Layer0 "Default Coverlay 2 Top" (split plane): 6.747,59.977 8.75,59.977 8.75,61.925 6.747,61.925
no net on Layer0 "Default Coverlay 2 Top" (split plane): 2.747,59.977 4.747,59.977 4.747,61.925 2.747,61.925
no net on Layer0 "Default Coverlay 2 Top" (split plane): -0.75,59.977 0.753,59.977 0.753,61.925 -0.75,61.925
no net on Layer0 "Default Coverlay 2 Top" (split plane): -4.75,59.977 -2.747,59.977 -2.747,61.92 -4.75,61.925
no net on Layer0 "Default Coverlay 2 Top" (split plane): -6.747,59.977 -6.747,61.925 -8.75,61.925 -8.75,59.977
no net on Layer0 "Default Coverlay 2 Top" (split plane): 17.44,46.855 17.578,46.071 23.822,46.071 23.822,61.925 10.747,61.925 10.747,59.977 10.795,59.977 10.87,59.974 11.016,59.944 11.154,59.887 11.278,59.804 11.384,59.698 11.467,59.574 11.524,59.436 11.553,59.29 11.557,59.215 11.557,57.183 11.557,57.108 11.586,56.96 11.644,56.822 11.727,56.697 11.833,56.591 11.958,56.508 12.097,56.45 12.244,56.421 12.319,56.421 18.923,56.421 19.053,56.41 19.298,56.322 19.499,56.157 19.633,55.934 19.67,55.809 19.67,53.986 19.634,53.86 19.5,53.637 19.299,53.472 19.053,53.384 18.923,53.373 18.923,51.021 18.919,50.946 18.89,50.8 18.833,50.661 18.75,50.537 18.645,50.432 18.52,50.349 18.382,50.291 18.236,50.262 18.161,50.259 16.637,50.259 16.562,50.259 16.415,50.229 16.276,50.172 16.151,50.088 16.045,49.982 15.962,49.857 15.904,49.718 15.875,49.571 15.875,49.496 15.875,47.957 16.126,47.957 16.243,47.952 16.472,47.912 16.69,47.832 16.891,47.716 17.069,47.567 17.219,47.388 17.335,47.187 17.415,46.969 17.44,46.855
no net on Layer0 "Default Coverlay 2 Top" (split plane): 20.861,27.442 21.21,25.458 23.822,25.458 23.822,27.442
no net on Layer0 "Default Coverlay 2 Top" (split plane): 20.168,31.379 20.515,29.408 23.822,29.408 23.822,31.379
no net on Layer0 "Default Coverlay 2 Top" (split plane): 19.314,36.225 19.821,33.35 23.822,33.35 23.822,36.225
no net on Layer0 "Default Coverlay 2 Top" (split plane): 18.619,40.17 18.933,38.385 18.934,38.382 18.966,38.202 23.822,38.202 23.822,40.17
no net on Layer0 "Default Coverlay 2 Top" (split plane): 17.925,44.104 18.272,42.139 23.822,42.139 23.822,44.104
no net on Layer0 "Default Coverlay 2 Top" (split plane): 23.848,-3.852 23.848,-0.316 23.822,-0.316 23.822,23.484 21.551,23.484 21.585,23.217 21.641,22.681 21.679,22.144 21.697,21.605 21.7,21.336 21.688,20.725 21.592,19.507 21.401,18.301 21.115,17.113 20.738,15.951 20.27,14.823 19.716,13.734 19.078,12.693 18.36,11.704 17.566,10.775 16.702,9.911 15.773,9.118 14.785,8.4 13.744,7.762 12.655,7.207 11.527,6.74 10.365,6.362 9.177,6.077 7.97,5.886 6.752,5.79 6.142,5.778 5.842,5.778 5.761,5.782 5.602,5.814 5.453,5.876 5.318,5.966 5.204,6.08 5.114,6.215 5.052,6.364 5.02,6.523 5.016,6.604 5.016,10.16 5.016,10.229 4.989,10.364 4.937,10.491 4.86,10.605 4.763,10.702 4.649,10.779 4.522,10.831 4.387,10.858 4.318,10.858 2.604,10.858 2.604,3.759 13.182,3.759 13.332,3.752 13.625,3.694 13.901,3.579 14.149,3.413 14.36,3.202 14.526,2.954 14.641,2.678 14.699,2.385 14.706,2.235 14.706,-0.305 14.699,-0.454 14.641,-0.747 14.526,-1.023 14.36,-1.272 14.149,-1.483 13.901,-1.649 13.625,-1.763 13.332,-1.821 13.182,-1.829 7.497,-1.829 7.497,-3.852
no net on Layer0 "Default Coverlay 2 Top" (split plane): -1.5,-3.852 1.5,-3.852 1.5,-1.829 -1.5,-1.829
no net on Layer0 "Default Coverlay 2 Top" (split plane): 3.497,-3.852 5.5,-3.852 5.5,-1.829 3.497,-1.829
no net on Layer0 "Default Coverlay 2 Top" (split plane): 45.72,-9.449 23.853,-9.449 -23.851,-9.449
GND on GND 3 "NONET_L-01_P-001" (solid, remove dead copper, pour order 376): -23.876,-9.449 -23.876,-4.183 -23.902,-4.158 -23.902,81.28 -23.876,81.305 45.72,81.305 45.745,81.28 45.745,-9.449 45.72,-9.474
GND on GND 3 "GND_L07_P322" (solid, pour order 322): 14.233,53.721 14.233,56.09 19.355,56.09 19.355,53.721
GND on GND 3 "GND_L07_P321" (solid, pour order 321): 16.256,45.237 14.529,45.237 14.376,45.39 14.376,47.193 14.684,47.501 16.126,47.501 16.408,47.219 16.408,45.39
GND on DHOR "DHOR-GND" (solid, remove dead copper, pour order 412): 14.072,39.167 14.658,38.58 16.656,38.58 17.438,39.363 17.437,44.104 23.853,44.104 23.853,35.783 45.368,35.783 45.361,67.158 23.853,67.158 23.853,46.535 17.437,46.535 16.829,47.142 14.656,47.142 14.072,46.558
DEFIB_COMMON on DHOR "|" (solid, pour order 368): 10.871,56.226 13.469,56.226 13.469,53.644 10.871,53.644 10.871,52.12 -10.408,52.12 -10.402,57.785 10.871,57.785
GND on DHOR "|" (solid, pour order 395): 15.505,56.769 20.142,56.769 20.142,53.442 15.505,53.442
GND on DHOR "NONET_L-01_P-001" (solid, remove dead copper, pour order 382): 25.044,8.077 25.044,14.362 42.57,14.362 42.57,8.077
GND on GND 1 "NONET_L-01_P-001" (solid, remove dead copper, pour order 388): -23.876,-9.449 -23.876,-4.445 -23.902,-4.445 -23.902,81.28 -23.876,81.305 45.72,81.305 45.745,81.28 45.745,-9.449 45.72,-9.474
GND on GND 2 "NONET_L-01_P-001" (solid, remove dead copper, pour order 385): -23.876,-9.449 -23.876,-4.183 -23.851,-4.183 -23.851,61.9 -23.876,61.9 -23.902,61.925 -23.902,81.28 -23.876,81.305 45.72,81.305 45.745,81.28 45.745,-9.449 45.72,-9.474
GND on BOT "NONET_L-01_P-001" (solid, remove dead copper, pour order 375): -23.876,-9.449 -23.876,-3.852 -23.851,-3.826 -23.851,61.9 -23.876,61.9 -23.902,61.925 -23.902,81.28 -23.876,81.305 45.72,81.305 45.745,81.28 45.745,-9.449 45.72,-9.474

## Keep-outs
Keep-Out Layer:
  rectangle: 36.144,59.461 45.697,65.405